# Altium PCB high-spped-thermocouple-logger-2ch_panel.PcbDoc (part 2 of 2)
Units mm, origin at the board's own origin, x right, y up, seen from the top; angles counter-clockwise.
Board outline 100 x 200 mm, 4 copper layers (Top Layer, GND Layer, VCC Layer, Bottom Layer), stack 1.55 mm thick; 2 components, 0 nets, 0 pads, 0 vias.
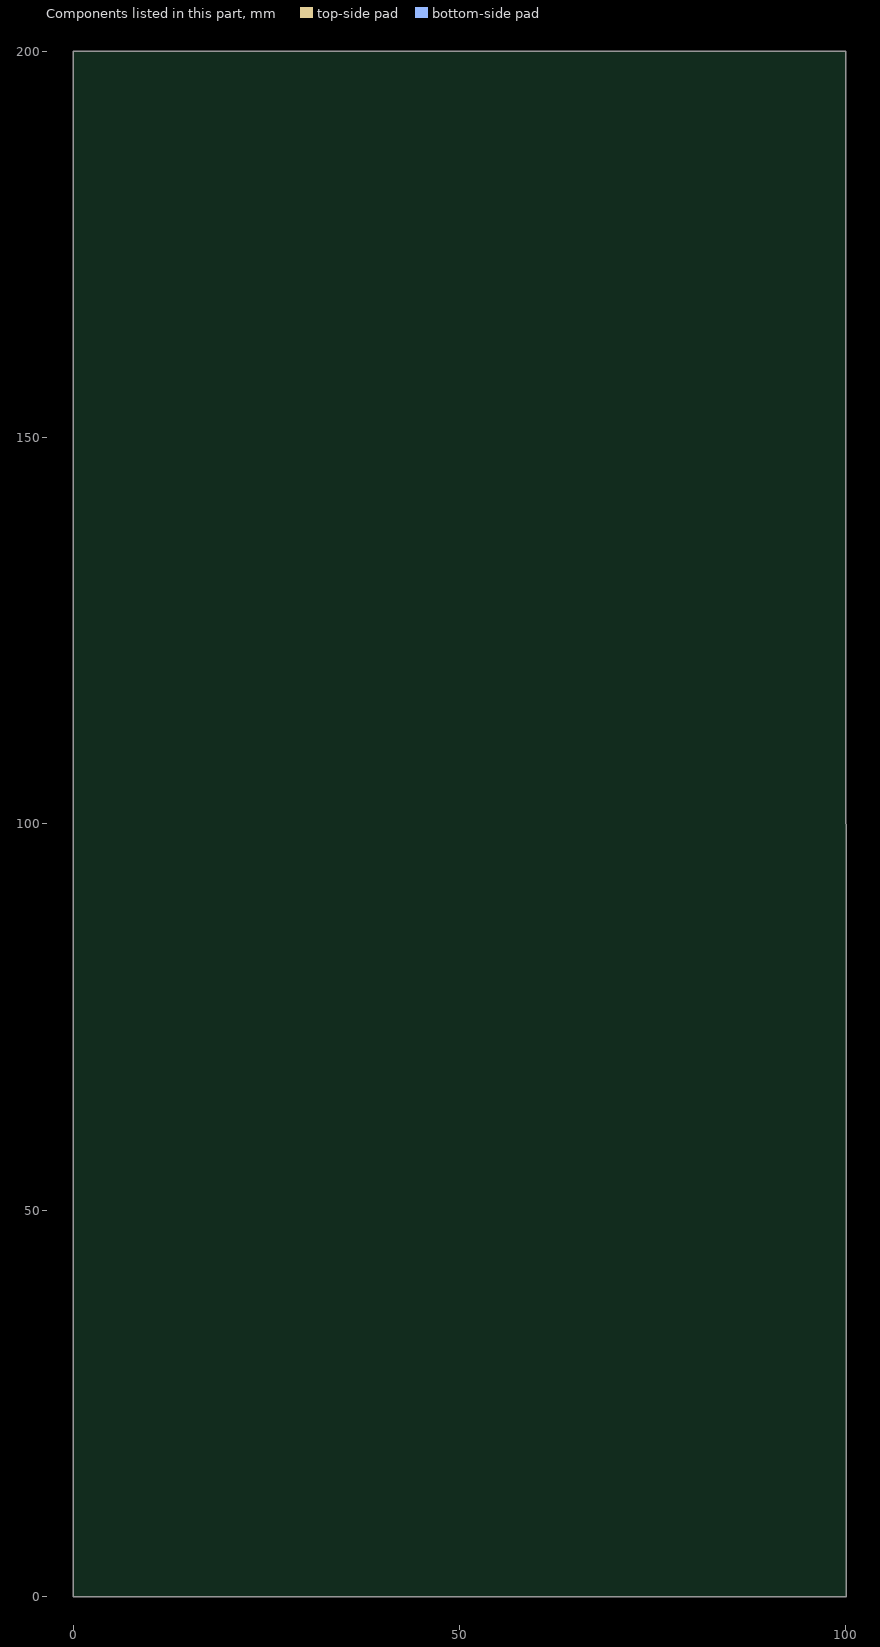
[diagram p4: the components of this part, seen from the top]

## Silkscreen, mask and mechanical layers (free items; w line width, h text height) (continued)
Mfg Info:
  drawing of 168 lines, arcs and shapes, not listed
  text "Layer" at -47.882,-53.168 h1.52
  text "Name" at -37.47,-53.168 h1.52
  text "Material" at -8.014,-53.168 h1.52
  text "Thickness" at 13.824,-53.168 h1.52
  text "Constant" at 30.329,-53.168 h1.52
  text "P" at 89.221,-54.207 h3.32
  text "A" at 90.741,-54.207 h3.32
  text "N" at 92.45,-54.207 h3.32
  text "E" at 94.349,-54.207 h3.32
  text "L" at 95.679,-54.207 h3.32
  text "T" at 97.388,-54.207 h3.32
  text "H" at 98.717,-54.207 h3.32
  text "I" at 100.427,-54.207 h3.32
  text "C" at 101.186,-54.207 h3.32
  text "K" at 102.706,-54.207 h3.32
  text "N" at 104.225,-54.207 h3.32
  text "E" at 106.124,-54.207 h3.32
  text "S" at 107.454,-54.207 h3.32
  text "S" at 108.783,-54.207 h3.32
  text "A" at 133.557,-54.207 h3.32
  text "P" at 135.266,-54.207 h3.32
  text "P" at 136.786,-54.207 h3.32
  text "R" at 138.305,-54.207 h3.32
  text "O" at 139.824,-54.207 h3.32
  text "X" at 141.724,-54.207 h3.32
  text "I" at 143.243,-54.207 h3.32
  text "M" at 144.003,-54.207 h3.32
  text "A" at 146.282,-54.207 h3.32
  text "T" at 147.991,-54.207 h3.32
  text "E" at 149.32,-54.207 h3.32
  text "Top Silkscreen" at -37.47,-56.216 h1.52
  text "Top Solder Mask" at -37.47,-59.264 h1.52
  text "Solder Resist" at -8.014,-59.264 h1.52
  text "0.005mm" at 13.824,-59.264 h1.52
  text "3.5" at 30.329,-59.264 h1.52
  text "C" at 89.221,-59.525 h3.32
  text "O" at 90.741,-59.525 h3.32
  text "P" at 92.64,-59.525 h3.32
  text "P" at 94.159,-59.525 h3.32
  text "E" at 95.679,-59.525 h3.32
  text "R" at 97.008,-59.525 h3.32
  text "T" at 99.097,-59.525 h3.32
  text "H" at 100.427,-59.525 h3.32
  text "I" at 102.136,-59.525 h3.32
  text "C" at 102.896,-59.525 h3.32
  text "K" at 104.415,-59.525 h3.32
  text "N" at 105.934,-59.525 h3.32
  text "E" at 107.834,-59.525 h3.32
  text "S" at 109.163,-59.525 h3.32
  text "S" at 110.492,-59.525 h3.32
  text "F" at 133.557,-59.525 h3.32
  text "I" at 134.887,-59.525 h3.32
  text "N" at 135.646,-59.525 h3.32
  text "A" at 137.545,-59.525 h3.32
  text "L" at 139.255,-59.525 h3.32
  text "(" at 140.964,-59.525 h3.32
  text "A" at 141.914,-59.525 h3.32
  text "F" at 143.623,-59.525 h3.32
  text "T" at 144.952,-59.525 h3.32
  text "E" at 146.282,-59.525 h3.32
  text "R" at 147.611,-59.525 h3.32
  text "P" at 149.7,-59.525 h3.32
  text "L" at 151.22,-59.525 h3.32
  text "A" at 152.359,-59.525 h3.32
  text "T" at 154.068,-59.525 h3.32
  text "I" at 155.398,-59.525 h3.32
  text "N" at 156.157,-59.525 h3.32
  text "G" at 158.057,-59.525 h3.32
  text ")" at 159.766,-59.525 h3.32
  text "1" at -47.882,-62.312 h1.52
  text "Top Layer" at -37.47,-62.312 h1.52
  text "0.035mm" at 13.824,-62.312 h1.52
  text "I" at 89.221,-64.843 h3.32
  text "N" at 89.981,-64.843 h3.32
  text "S" at 91.88,-64.843 h3.32
  text "U" at 93.21,-64.843 h3.32
  text "L" at 94.919,-64.843 h3.32
  text "A" at 96.059,-64.843 h3.32
  text "T" at 97.768,-64.843 h3.32
  text "I" at 99.097,-64.843 h3.32
  text "O" at 99.857,-64.843 h3.32
  text "N" at 101.756,-64.843 h3.32
  text "M" at 104.225,-64.843 h3.32
  text "A" at 106.504,-64.843 h3.32
  text "T" at 108.213,-64.843 h3.32
  text "E" at 109.543,-64.843 h3.32
  text "R" at 110.872,-64.843 h3.32
  text "I" at 112.392,-64.843 h3.32
  text "A" at 113.151,-64.843 h3.32
  text "L" at 114.861,-64.843 h3.32
  text "T" at 116.57,-64.843 h3.32
  text "H" at 117.899,-64.843 h3.32
  text "I" at 119.609,-64.843 h3.32
  text "C" at 120.368,-64.843 h3.32
  text "K" at 121.888,-64.843 h3.32
  text "N" at 123.407,-64.843 h3.32
  text "E" at 125.306,-64.843 h3.32
  text "S" at 126.636,-64.843 h3.32
  text "S" at 127.965,-64.843 h3.32
  text "R" at 133.557,-64.843 h3.32
  text "E" at 135.076,-64.843 h3.32
  text "C" at 136.406,-64.843 h3.32
  text "O" at 137.925,-64.843 h3.32
  text "M" at 139.824,-64.843 h3.32
  text "M" at 142.103,-64.843 h3.32
  text "E" at 144.382,-64.843 h3.32
  text "N" at 145.712,-64.843 h3.32
  text "D" at 147.611,-64.843 h3.32
  text "E" at 149.32,-64.843 h3.32
  text "D" at 150.65,-64.843 h3.32
  text "Dielectric 1" at -37.47,-65.36 h1.52
  text "FR-4" at -8.014,-65.36 h1.52
  text "0.350mm" at 13.824,-65.36 h1.52
  text "4.2" at 30.329,-65.36 h1.52
  text "2" at -47.882,-68.408 h1.52
  text "GND Layer" at -37.47,-68.408 h1.52
  text "0.035mm" at 13.824,-68.408 h1.52
  text "D" at 89.221,-70.161 h3.32
  text "I" at 90.931,-70.161 h3.32
  text "E" at 91.69,-70.161 h3.32
  text "L" at 93.02,-70.161 h3.32
  text "E" at 94.159,-70.161 h3.32
  text "C" at 95.489,-70.161 h3.32
  text "T" at 97.008,-70.161 h3.32
  text "R" at 98.338,-70.161 h3.32
  text "I" at 99.857,-70.161 h3.32
  text "C" at 100.617,-70.161 h3.32
  text "C" at 102.706,-70.161 h3.32
  text "O" at 104.225,-70.161 h3.32
  text "N" at 106.124,-70.161 h3.32
  text "S" at 108.023,-70.161 h3.32
  text "T" at 109.353,-70.161 h3.32
  text "A" at 110.682,-70.161 h3.32
  text "N" at 112.392,-70.161 h3.32
  text "T" at 114.291,-70.161 h3.32
  text "S" at 115.62,-70.161 h3.32
  text "A" at 133.557,-70.161 h3.32
  text "P" at 135.266,-70.161 h3.32
  text "P" at 136.786,-70.161 h3.32
  text "R" at 138.305,-70.161 h3.32
  text "O" at 139.824,-70.161 h3.32
  text "X" at 141.724,-70.161 h3.32
  text "I" at 143.243,-70.161 h3.32
  text "M" at 144.003,-70.161 h3.32
  text "A" at 146.282,-70.161 h3.32
  text "T" at 147.991,-70.161 h3.32
  text "E" at 149.32,-70.161 h3.32
  text "Dielectric 3" at -37.47,-71.456 h1.52
  text "FR-4" at -8.014,-71.456 h1.52
  text "0.710mm" at 13.824,-71.456 h1.52
  text "4.2" at 30.329,-71.456 h1.52
  text "3" at -47.882,-74.504 h1.52
  text "VCC Layer" at -37.47,-74.504 h1.52
  text "0.035mm" at 13.824,-74.504 h1.52
  text "M" at 89.221,-75.478 h3.32
  text "A" at 91.5,-75.478 h3.32
  text "T" at 93.21,-75.478 h3.32
  text "E" at 94.539,-75.478 h3.32
  text "R" at 95.869,-75.478 h3.32
  text "I" at 97.388,-75.478 h3.32
  text "A" at 98.148,-75.478 h3.32
  text "L" at 99.857,-75.478 h3.32
  text "S" at 100.996,-75.478 h3.32
  text "I" at 102.896,-75.478 h3.32
  text "N" at 103.655,-75.478 h3.32
  text "S" at 106.124,-75.478 h3.32
  text "T" at 107.454,-75.478 h3.32
  text "A" at 108.783,-75.478 h3.32
  text "C" at 110.492,-75.478 h3.32
  text "K" at 112.012,-75.478 h3.32
  text "U" at 113.531,-75.478 h3.32
  text "P" at 115.24,-75.478 h3.32
  text "T" at 117.329,-75.478 h3.32
  text "A" at 118.659,-75.478 h3.32
  text "B" at 120.368,-75.478 h3.32
  text "L" at 121.888,-75.478 h3.32
  text "E" at 123.027,-75.478 h3.32
  text "R" at 133.557,-75.478 h3.32
  text "E" at 135.076,-75.478 h3.32
  text "C" at 136.406,-75.478 h3.32
  text "O" at 137.925,-75.478 h3.32
  text "M" at 139.824,-75.478 h3.32
  text "M" at 142.103,-75.478 h3.32
  text "E" at 144.382,-75.478 h3.32
  text "N" at 145.712,-75.478 h3.32
  text "D" at 147.611,-75.478 h3.32
  text "E" at 149.32,-75.478 h3.32
  text "D" at 150.65,-75.478 h3.32
  text "Dielectric 2" at -37.47,-77.552 h1.52
  text "FR-4" at -8.014,-77.552 h1.52
  text "0.350mm" at 13.824,-77.552 h1.52
  text "4.2" at 30.329,-77.552 h1.52
  text "4" at -47.882,-80.6 h1.52
  text "Bottom Layer" at -37.47,-80.6 h1.52
  text "0.035mm" at 13.824,-80.6 h1.52
  text "U" at 89.221,-80.796 h3.32
  text "S" at 90.931,-80.796 h3.32
  text "E" at 92.26,-80.796 h3.32
  text "O" at 94.159,-80.796 h3.32
  text "N" at 96.059,-80.796 h3.32
  text "L" at 97.958,-80.796 h3.32
  text "Y" at 99.097,-80.796 h3.32
  text "U" at 100.996,-80.796 h3.32
  text "L" at 102.706,-80.796 h3.32
  text "9" at 103.845,-80.796 h3.32
  text "4" at 105.175,-80.796 h3.32
  text "V" at 107.074,-80.796 h3.32
  text "-" at 108.783,-80.796 h3.32
  text "0" at 109.733,-80.796 h3.32
  text "M" at 111.632,-80.796 h3.32
  text "A" at 113.911,-80.796 h3.32
  text "T" at 115.62,-80.796 h3.32
  text "E" at 116.95,-80.796 h3.32
  text "R" at 118.279,-80.796 h3.32
  text "I" at 119.798,-80.796 h3.32
  text "A" at 120.558,-80.796 h3.32
  text "L" at 122.267,-80.796 h3.32
  text "M" at 133.557,-80.796 h3.32
  text "A" at 135.836,-80.796 h3.32
  text "N" at 137.545,-80.796 h3.32
  text "D" at 139.445,-80.796 h3.32
  text "A" at 141.154,-80.796 h3.32
  text "T" at 142.863,-80.796 h3.32
  text "O" at 144.193,-80.796 h3.32
  text "R" at 146.092,-80.796 h3.32
  text "Y" at 147.611,-80.796 h3.32
  text "Bottom Solder Mask" at -37.47,-83.648 h1.52
  text "Solder Resist" at -8.014,-83.648 h1.52
  text "0.005mm" at 13.824,-83.648 h1.52
  text "3.5" at 30.329,-83.648 h1.52
  text "B" at 89.221,-86.114 h3.32
  text "O" at 90.741,-86.114 h3.32
  text "A" at 92.64,-86.114 h3.32
  text "R" at 94.349,-86.114 h3.32
  text "D" at 95.869,-86.114 h3.32
  text "F" at 98.148,-86.114 h3.32
  text "I" at 99.477,-86.114 h3.32
  text "N" at 100.237,-86.114 h3.32
  text "I" at 102.136,-86.114 h3.32
  text "S" at 102.896,-86.114 h3.32
  text "H" at 104.225,-86.114 h3.32
  text "E" at 133.557,-86.114 h3.32
  text "N" at 134.887,-86.114 h3.32
  text "I" at 136.786,-86.114 h3.32
  text "G" at 137.545,-86.114 h3.32
  text "(" at 139.824,-86.114 h3.32
  text "N" at 140.774,-86.114 h3.32
  text "I" at 142.673,-86.114 h3.32
  text "T" at 144.003,-86.114 h3.32
  text "H" at 145.332,-86.114 h3.32
  text "I" at 147.041,-86.114 h3.32
  text "C" at 147.801,-86.114 h3.32
  text "K" at 149.32,-86.114 h3.32
  text "N" at 150.84,-86.114 h3.32
  text "E" at 152.739,-86.114 h3.32
  text "S" at 154.068,-86.114 h3.32
  text "S" at 155.398,-86.114 h3.32
  text "3" at 157.297,-86.114 h3.32
  text "-" at 158.626,-86.114 h3.32
  text "6" at 159.576,-86.114 h3.32
  text "U" at 161.475,-86.114 h3.32
  text "M" at 163.184,-86.114 h3.32
  text "," at 165.464,-86.114 h3.32
  text "A" at 166.793,-86.114 h3.32
  text "U" at 168.502,-86.114 h3.32
  text "T" at 170.781,-86.114 h3.32
  text "H" at 172.111,-86.114 h3.32
  text "I" at 173.82,-86.114 h3.32
  text "C" at 174.58,-86.114 h3.32
  text "K" at 176.099,-86.114 h3.32
  text "N" at 177.618,-86.114 h3.32
  text "E" at 179.518,-86.114 h3.32
  text "S" at 180.847,-86.114 h3.32
  text "S" at 182.176,-86.114 h3.32
  text "≥" at 184.076,-86.114 h3.32
  text "0" at 185.975,-86.114 h3.32
  text "." at 187.304,-86.114 h3.32
  text "0" at 188.064,-86.114 h3.32
  text "5" at 189.393,-86.114 h3.32
  text "U" at 191.293,-86.114 h3.32
  text "M" at 193.002,-86.114 h3.32
  text ")" at 195.281,-86.114 h3.32
  text "Bottom Silkscreen" at -37.47,-86.696 h1.52
  text "Total board thickness:" at -47.882,-89.744 h1.52
  text "1.560mm" at 13.824,-89.744 h1.52
  text "S" at 89.221,-91.431 h3.32
  text "O" at 90.551,-91.431 h3.32
  text "L" at 92.45,-91.431 h3.32
  text "D" at 93.59,-91.431 h3.32
  text "E" at 95.299,-91.431 h3.32
  text "R" at 96.628,-91.431 h3.32
  text "M" at 98.148,-91.431 h3.32
  text "A" at 100.427,-91.431 h3.32
  text "S" at 102.136,-91.431 h3.32
  text "K" at 103.465,-91.431 h3.32
  text "G" at 133.557,-91.431 h3.32
  text "R" at 135.266,-91.431 h3.32
  text "E" at 136.786,-91.431 h3.32
  text "E" at 138.115,-91.431 h3.32
  text "N" at 139.445,-91.431 h3.32
  text "," at 141.344,-91.431 h3.32
  text "B" at 142.673,-91.431 h3.32
  text "O" at 144.193,-91.431 h3.32
  text "T" at 146.092,-91.431 h3.32
  text "H" at 147.421,-91.431 h3.32
  text "S" at 149.7,-91.431 h3.32
  text "I" at 151.03,-91.431 h3.32
  text "D" at 151.789,-91.431 h3.32
  text "E" at 153.499,-91.431 h3.32
  text "S" at 154.828,-91.431 h3.32
  text "S" at 89.221,-96.749 h3.32
  text "O" at 90.551,-96.749 h3.32
  text "L" at 92.45,-96.749 h3.32
  text "D" at 93.59,-96.749 h3.32
  text "E" at 95.299,-96.749 h3.32
  text "R" at 96.628,-96.749 h3.32
  text "M" at 98.717,-96.749 h3.32
  text "A" at 100.996,-96.749 h3.32
  text "S" at 102.706,-96.749 h3.32
  text "K" at 104.035,-96.749 h3.32
  text "C" at 106.124,-96.749 h3.32
  text "L" at 107.644,-96.749 h3.32
  text "E" at 108.783,-96.749 h3.32
  text "A" at 110.113,-96.749 h3.32
  text "R" at 111.822,-96.749 h3.32
  text "A" at 113.341,-96.749 h3.32
  text "N" at 115.05,-96.749 h3.32
  text "C" at 116.95,-96.749 h3.32
  text "E" at 118.469,-96.749 h3.32
  text "S" at 119.798,-96.749 h3.32
  text "F" at 121.698,-96.749 h3.32
  text "O" at 123.027,-96.749 h3.32
  text "R" at 124.926,-96.749 h3.32
  text "V" at 127.015,-96.749 h3.32
  text "I" at 128.725,-96.749 h3.32
  text "A" at 129.484,-96.749 h3.32
  text "S" at 131.194,-96.749 h3.32
  text "R" at 133.557,-96.749 h3.32
  text "E" at 135.076,-96.749 h3.32
  text "C" at 136.406,-96.749 h3.32
  text "O" at 137.925,-96.749 h3.32
  text "M" at 139.824,-96.749 h3.32
  text "M" at 142.103,-96.749 h3.32
  text "E" at 144.382,-96.749 h3.32
  text "N" at 145.712,-96.749 h3.32
  text "D" at 147.611,-96.749 h3.32
  text "E" at 149.32,-96.749 h3.32
  text "D" at 150.65,-96.749 h3.32
  text "M" at 89.221,-102.067 h3.32
  text "A" at 91.5,-102.067 h3.32
  text "X" at 93.21,-102.067 h3.32
  text "I" at 94.729,-102.067 h3.32
  text "M" at 95.489,-102.067 h3.32
  text "U" at 97.768,-102.067 h3.32
  text "M" at 99.477,-102.067 h3.32
  text "C" at 102.326,-102.067 h3.32
  text "L" at 103.845,-102.067 h3.32
  text "E" at 104.985,-102.067 h3.32
  text "A" at 106.314,-102.067 h3.32
  text "R" at 108.023,-102.067 h3.32
  text "A" at 109.543,-102.067 h3.32
  text "N" at 111.252,-102.067 h3.32
  text "C" at 113.151,-102.067 h3.32
  text "E" at 114.671,-102.067 h3.32
  text "O" at 116.57,-102.067 h3.32
  text "F" at 118.469,-102.067 h3.32
  text "S" at 120.368,-102.067 h3.32
  text "O" at 121.698,-102.067 h3.32
  text "L" at 123.597,-102.067 h3.32
  text "D" at 124.736,-102.067 h3.32
  text "E" at 126.446,-102.067 h3.32
  text "R" at 127.775,-102.067 h3.32
  text "1" at 133.557,-103.966 h3.32
  text "5" at 134.887,-103.966 h3.32
  text "0" at 136.216,-103.966 h3.32
  text "U" at 138.115,-103.966 h3.32
  text "M" at 139.824,-103.966 h3.32
  text "I" at 142.673,-103.966 h3.32
  text "F" at 143.433,-103.966 h3.32
  text "N" at 145.332,-103.966 h3.32
  text "O" at 147.231,-103.966 h3.32
  text "T" at 149.13,-103.966 h3.32
  text "S" at 151.03,-103.966 h3.32
  text "P" at 152.359,-103.966 h3.32
  text "E" at 153.878,-103.966 h3.32
  text "C" at 155.208,-103.966 h3.32
  text "I" at 156.727,-103.966 h3.32
  text "F" at 157.487,-103.966 h3.32
  text "I" at 158.816,-103.966 h3.32
  text "E" at 159.576,-103.966 h3.32
  text "D" at 160.905,-103.966 h3.32
  text "O" at 163.184,-103.966 h3.32
  text "T" at 165.084,-103.966 h3.32
  text "H" at 166.413,-103.966 h3.32
  text "E" at 168.122,-103.966 h3.32
  text "R" at 169.452,-103.966 h3.32
  text "W" at 170.971,-103.966 h3.32
  text "I" at 173.44,-103.966 h3.32
  text "S" at 174.2,-103.966 h3.32
  text "E" at 175.529,-103.966 h3.32
  text "M" at 89.221,-105.865 h3.32
  text "A" at 91.5,-105.865 h3.32
  text "S" at 93.21,-105.865 h3.32
  text "K" at 94.539,-105.865 h3.32
  text "F" at 96.628,-105.865 h3.32
  text "R" at 97.958,-105.865 h3.32
  text "O" at 99.477,-105.865 h3.32
  text "M" at 101.376,-105.865 h3.32
  text "V" at 104.225,-105.865 h3.32
  text "I" at 105.934,-105.865 h3.32
  text "A" at 106.694,-105.865 h3.32
  text "F" at 108.973,-105.865 h3.32
  text "I" at 110.302,-105.865 h3.32
  text "N" at 111.062,-105.865 h3.32
  text "A" at 112.961,-105.865 h3.32
  text "L" at 114.671,-105.865 h3.32
  text "H" at 116.38,-105.865 h3.32
  text "O" at 118.089,-105.865 h3.32
  text "L" at 119.988,-105.865 h3.32
  text "E" at 121.128,-105.865 h3.32
  text "E" at 123.027,-105.865 h3.32
  text "D" at 124.356,-105.865 h3.32
  text "G" at 126.066,-105.865 h3.32
  text "E" at 127.775,-105.865 h3.32
  text "R" at 89.221,-111.183 h3.32
  text "E" at 90.741,-111.183 h3.32
  text "M" at 92.07,-111.183 h3.32
  text "O" at 94.349,-111.183 h3.32
  text "V" at 96.248,-111.183 h3.32
  text "I" at 97.958,-111.183 h3.32
  text "N" at 98.717,-111.183 h3.32
  text "G" at 100.617,-111.183 h3.32
  text "S" at 102.896,-111.183 h3.32
  text "O" at 104.225,-111.183 h3.32
  text "L" at 106.124,-111.183 h3.32
  text "D" at 107.264,-111.183 h3.32
  text "E" at 108.973,-111.183 h3.32
  text "R" at 110.302,-111.183 h3.32
  text "M" at 111.822,-111.183 h3.32
  text "A" at 114.101,-111.183 h3.32
  text "S" at 115.81,-111.183 h3.32
  text "K" at 117.14,-111.183 h3.32
  text "B" at 119.229,-111.183 h3.32
  text "E" at 120.748,-111.183 h3.32
  text "T" at 122.077,-111.183 h3.32
  text "W" at 123.407,-111.183 h3.32
  text "E" at 125.876,-111.183 h3.32
  text "E" at 127.205,-111.183 h3.32
  text "N" at 128.535,-111.183 h3.32
  text "P" at 133.557,-113.082 h3.32
  text "O" at 135.076,-113.082 h3.32
  text "S" at 136.976,-113.082 h3.32
  text "S" at 138.305,-113.082 h3.32
  text "I" at 139.635,-113.082 h3.32
  text "B" at 140.394,-113.082 h3.32
  text "L" at 141.914,-113.082 h3.32
  text "E" at 143.053,-113.082 h3.32
  text "I" at 144.952,-113.082 h3.32
  text "F" at 145.712,-113.082 h3.32
  text "T" at 147.611,-113.082 h3.32
  text "H" at 148.941,-113.082 h3.32
  text "E" at 150.65,-113.082 h3.32
  text "P" at 152.549,-113.082 h3.32
  text "A" at 154.068,-113.082 h3.32
  text "D" at 155.778,-113.082 h3.32
  text "S" at 158.057,-113.082 h3.32
  text "P" at 159.386,-113.082 h3.32
  text "A" at 160.905,-113.082 h3.32
  text "C" at 162.615,-113.082 h3.32
  text "I" at 164.134,-113.082 h3.32
  text "N" at 164.894,-113.082 h3.32
  text "G" at 166.793,-113.082 h3.32
  text "(" at 169.072,-113.082 h3.32
  text "C" at 170.022,-113.082 h3.32
  text "L" at 171.541,-113.082 h3.32
  text "E" at 172.68,-113.082 h3.32
  text "A" at 174.01,-113.082 h3.32
  text "R" at 175.719,-113.082 h3.32
  text "A" at 177.239,-113.082 h3.32
  text "N" at 178.948,-113.082 h3.32
  text "C" at 180.847,-113.082 h3.32
  text "E" at 182.366,-113.082 h3.32
  text ")" at 183.696,-113.082 h3.32
  text "I" at 185.215,-113.082 h3.32
  text "S" at 185.975,-113.082 h3.32
  text "L" at 187.874,-113.082 h3.32
  text "E" at 189.013,-113.082 h3.32
  text "S" at 190.343,-113.082 h3.32
  text "S" at 191.672,-113.082 h3.32
  text "T" at 193.572,-113.082 h3.32
  text "H" at 194.901,-113.082 h3.32
  text "A" at 196.61,-113.082 h3.32
  text "N" at 198.32,-113.082 h3.32
  text "0" at 200.788,-113.082 h3.32
  text "." at 202.118,-113.082 h3.32
  text "2" at 202.878,-113.082 h3.32
  text "9" at 204.207,-113.082 h3.32
  text "M" at 206.106,-113.082 h3.32
  text "M" at 208.385,-113.082 h3.32
  text "T" at 89.221,-114.981 h3.32
  text "H" at 90.551,-114.981 h3.32
  text "E" at 92.26,-114.981 h3.32
  text "C" at 94.159,-114.981 h3.32
  text "O" at 95.679,-114.981 h3.32
  text "M" at 97.578,-114.981 h3.32
  text "P" at 99.857,-114.981 h3.32
  text "O" at 101.376,-114.981 h3.32
  text "N" at 103.275,-114.981 h3.32
  text "E" at 105.175,-114.981 h3.32
  text "N" at 106.504,-114.981 h3.32
  text "T" at 108.403,-114.981 h3.32
  text "P" at 110.302,-114.981 h3.32
  text "A" at 111.822,-114.981 h3.32
  text "D" at 113.531,-114.981 h3.32
  text "S" at 115.24,-114.981 h3.32
  text "S" at 89.221,-120.299 h3.32
  text "O" at 90.551,-120.299 h3.32
  text "L" at 92.45,-120.299 h3.32
  text "D" at 93.59,-120.299 h3.32
  text "E" at 95.299,-120.299 h3.32
  text "R" at 96.628,-120.299 h3.32
  text "M" at 98.148,-120.299 h3.32
  text "A" at 100.427,-120.299 h3.32
  text "S" at 102.136,-120.299 h3.32
  text "K" at 103.465,-120.299 h3.32
  text "O" at 105.554,-120.299 h3.32
  text "P" at 107.454,-120.299 h3.32
  text "E" at 108.973,-120.299 h3.32
  text "N" at 110.302,-120.299 h3.32
  text "I" at 112.202,-120.299 h3.32
  text "N" at 112.961,-120.299 h3.32
  text "G" at 114.861,-120.299 h3.32
  text "R" at 117.14,-120.299 h3.32
  text "E" at 118.659,-120.299 h3.32
  text "D" at 119.988,-120.299 h3.32
  text "U" at 121.698,-120.299 h3.32
  text "C" at 123.407,-120.299 h3.32
  text "T" at 124.926,-120.299 h3.32
  text "I" at 126.256,-120.299 h3.32
  text "O" at 127.015,-120.299 h3.32
  text "N" at 128.915,-120.299 h3.32
  text "P" at 133.557,-122.198 h3.32
  text "O" at 135.076,-122.198 h3.32
  text "S" at 136.976,-122.198 h3.32
  text "S" at 138.305,-122.198 h3.32
  text "I" at 139.635,-122.198 h3.32
  text "B" at 140.394,-122.198 h3.32
  text "L" at 141.914,-122.198 h3.32
  text "E" at 143.053,-122.198 h3.32
  text "T" at 144.952,-122.198 h3.32
  text "O" at 146.282,-122.198 h3.32
  text "A" at 148.751,-122.198 h3.32
  text "V" at 150.46,-122.198 h3.32
  text "O" at 152.169,-122.198 h3.32
  text "I" at 154.068,-122.198 h3.32
  text "D" at 154.828,-122.198 h3.32
  text "E" at 157.107,-122.198 h3.32
  text "X" at 158.437,-122.198 h3.32
  text "P" at 159.956,-122.198 h3.32
  text "O" at 161.475,-122.198 h3.32
  text "S" at 163.374,-122.198 h3.32
  text "E" at 164.704,-122.198 h3.32
  text "D" at 166.033,-122.198 h3.32
  text "C" at 168.312,-122.198 h3.32
  text "O" at 169.832,-122.198 h3.32
  text "P" at 171.731,-122.198 h3.32
  text "P" at 173.25,-122.198 h3.32
  text "E" at 174.77,-122.198 h3.32
  text "R" at 176.099,-122.198 h3.32
  text "O" at 89.221,-124.098 h3.32
  text "N" at 91.121,-124.098 h3.32
  text "F" at 93.59,-124.098 h3.32
  text "I" at 94.919,-124.098 h3.32
  text "D" at 95.679,-124.098 h3.32
  text "U" at 97.388,-124.098 h3.32
  text "C" at 99.097,-124.098 h3.32
  text "I" at 100.617,-124.098 h3.32
  text "A" at 101.376,-124.098 h3.32
  text "L" at 103.086,-124.098 h3.32
  text "M" at 104.795,-124.098 h3.32
  text "A" at 107.074,-124.098 h3.32
  text "R" at 108.783,-124.098 h3.32
  text "K" at 110.302,-124.098 h3.32
  text "S" at 111.822,-124.098 h3.32
  text "S" at 89.221,-129.415 h3.32
  text "I" at 90.551,-129.415 h3.32
  text "L" at 91.311,-129.415 h3.32
  text "K" at 92.45,-129.415 h3.32
  text "S" at 93.969,-129.415 h3.32
  text "C" at 95.299,-129.415 h3.32
  text "R" at 96.818,-129.415 h3.32
  text "E" at 98.338,-129.415 h3.32
  text "E" at 99.667,-129.415 h3.32
  text "N" at 100.996,-129.415 h3.32
  text "W" at 133.557,-129.415 h3.32
  text "H" at 136.026,-129.415 h3.32
  text "I" at 137.735,-129.415 h3.32
  text "T" at 138.495,-129.415 h3.32
  text "E" at 139.824,-129.415 h3.32
  text "," at 141.154,-129.415 h3.32
  text "T" at 142.483,-129.415 h3.32
  text "O" at 143.813,-129.415 h3.32
  text "P" at 145.712,-129.415 h3.32
  text "O" at 147.801,-129.415 h3.32
  text "N" at 149.7,-129.415 h3.32
  text "L" at 151.599,-129.415 h3.32
  text "Y" at 152.739,-129.415 h3.32
  text "S" at 89.221,-134.733 h3.32
  text "I" at 90.551,-134.733 h3.32
  text "L" at 91.311,-134.733 h3.32
  text "K" at 92.45,-134.733 h3.32
  text "S" at 93.969,-134.733 h3.32
  text "C" at 95.299,-134.733 h3.32
  text "R" at 96.818,-134.733 h3.32
  text "E" at 98.338,-134.733 h3.32
  text "E" at 99.667,-134.733 h3.32
  text "N" at 100.996,-134.733 h3.32
  text "O" at 103.465,-134.733 h3.32
  text "V" at 105.365,-134.733 h3.32
  text "E" at 107.074,-134.733 h3.32
  text "R" at 108.403,-134.733 h3.32
  text "L" at 109.923,-134.733 h3.32
  text "A" at 111.062,-134.733 h3.32
  text "P" at 112.771,-134.733 h3.32
  text "P" at 114.291,-134.733 h3.32
  text "I" at 115.81,-134.733 h3.32
  text "N" at 116.57,-134.733 h3.32
  text "G" at 118.469,-134.733 h3.32
  text "T" at 120.748,-134.733 h3.32
  text "H" at 122.077,-134.733 h3.32
  text "E" at 123.787,-134.733 h3.32
  text "B" at 125.686,-134.733 h3.32
  text "A" at 127.205,-134.733 h3.32
  text "S" at 128.915,-134.733 h3.32
  text "E" at 130.244,-134.733 h3.32
  text "Y" at 133.557,-136.632 h3.32
  text "O" at 134.887,-136.632 h3.32
  text "U" at 136.786,-136.632 h3.32
  text "C" at 139.065,-136.632 h3.32
  text "A" at 140.584,-136.632 h3.32
  text "N" at 142.293,-136.632 h3.32
  text "C" at 144.762,-136.632 h3.32
  text "U" at 146.282,-136.632 h3.32
  text "T" at 147.991,-136.632 h3.32
  text "T" at 149.89,-136.632 h3.32
  text "H" at 151.22,-136.632 h3.32
  text "E" at 152.929,-136.632 h3.32
  text "O" at 154.828,-136.632 h3.32
  text "V" at 156.727,-136.632 h3.32
  text "E" at 158.437,-136.632 h3.32
  text "R" at 159.766,-136.632 h3.32
  text "L" at 161.285,-136.632 h3.32
  text "A" at 162.425,-136.632 h3.32
  text "P" at 164.134,-136.632 h3.32
  text "P" at 165.653,-136.632 h3.32
  text "I" at 167.173,-136.632 h3.32
  text "N" at 167.932,-136.632 h3.32
  text "G" at 169.832,-136.632 h3.32
  text "S" at 172.111,-136.632 h3.32
  text "I" at 173.44,-136.632 h3.32
  text "L" at 174.2,-136.632 h3.32
  text "K" at 175.339,-136.632 h3.32
  text "S" at 176.859,-136.632 h3.32
  text "C" at 178.188,-136.632 h3.32
  text "R" at 179.707,-136.632 h3.32
  text "E" at 181.227,-136.632 h3.32
  text "E" at 182.556,-136.632 h3.32
  text "N" at 183.886,-136.632 h3.32
  text "C" at 89.221,-138.531 h3.32
  text "O" at 90.741,-138.531 h3.32
  text "P" at 92.64,-138.531 h3.32
  text "P" at 94.159,-138.531 h3.32
  text "E" at 95.679,-138.531 h3.32
  text "R" at 97.008,-138.531 h3.32
  text "O" at 99.097,-138.531 h3.32
  text "R" at 100.996,-138.531 h3.32
  text "T" at 103.086,-138.531 h3.32
  text "H" at 104.415,-138.531 h3.32
  text "E" at 106.124,-138.531 h3.32
  text "B" at 108.023,-138.531 h3.32
  text "O" at 109.543,-138.531 h3.32
  text "A" at 111.442,-138.531 h3.32
  text "R" at 113.151,-138.531 h3.32
  text "D" at 114.671,-138.531 h3.32
  text "O" at 116.95,-138.531 h3.32
  text "U" at 118.849,-138.531 h3.32
  text "T" at 120.558,-138.531 h3.32
  text "L" at 121.888,-138.531 h3.32
  text "I" at 123.027,-138.531 h3.32
  text "N" at 123.787,-138.531 h3.32
  text "E" at 125.686,-138.531 h3.32
  text "A" at 89.221,-143.849 h3.32
  text "D" at 90.931,-143.849 h3.32
  text "D" at 92.64,-143.849 h3.32
  text "I" at 94.349,-143.849 h3.32
  text "N" at 95.109,-143.849 h3.32
  text "G" at 97.008,-143.849 h3.32
  text "U" at 99.287,-143.849 h3.32
  text "L" at 100.996,-143.849 h3.32
  text "L" at 102.706,-143.849 h3.32
  text "O" at 103.845,-143.849 h3.32
  text "G" at 105.744,-143.849 h3.32
  text "O" at 107.454,-143.849 h3.32
  text "," at 109.353,-143.849 h3.32
  text "F" at 110.682,-143.849 h3.32
  text "I" at 112.012,-143.849 h3.32
  text "L" at 112.771,-143.849 h3.32
  text "E" at 113.911,-143.849 h3.32
  text "N" at 115.24,-143.849 h3.32
  text "U" at 117.14,-143.849 h3.32
  text "M" at 118.849,-143.849 h3.32
  text "B" at 121.128,-143.849 h3.32
  text "E" at 122.647,-143.849 h3.32
  text "R" at 123.977,-143.849 h3.32
  text "O" at 126.066,-143.849 h3.32
  text "R" at 127.965,-143.849 h3.32
  text "O" at 133.557,-145.748 h3.32
  text "K" at 135.456,-145.748 h3.32
  text "," at 136.976,-145.748 h3.32
  text "T" at 138.305,-145.748 h3.32
  text "O" at 139.635,-145.748 h3.32
  text "S" at 142.103,-145.748 h3.32
  text "I" at 143.433,-145.748 h3.32
  text "L" at 144.193,-145.748 h3.32
  text "K" at 145.332,-145.748 h3.32
  text "S" at 146.851,-145.748 h3.32
  text "C" at 148.181,-145.748 h3.32
  text "R" at 149.7,-145.748 h3.32
  text "E" at 151.22,-145.748 h3.32
  text "E" at 152.549,-145.748 h3.32
  text "N" at 153.878,-145.748 h3.32
  text "O" at 156.347,-145.748 h3.32
  text "R" at 158.247,-145.748 h3.32
  text "S" at 160.336,-145.748 h3.32
  text "O" at 161.665,-145.748 h3.32
  text "L" at 163.564,-145.748 h3.32
  text "D" at 164.704,-145.748 h3.32
  text "E" at 166.413,-145.748 h3.32
  text "R" at 167.743,-145.748 h3.32
  text "M" at 169.262,-145.748 h3.32
  text "A" at 171.541,-145.748 h3.32
  text "S" at 173.25,-145.748 h3.32
  text "K" at 174.58,-145.748 h3.32
  text "M" at 89.221,-147.648 h3.32
  text "A" at 91.5,-147.648 h3.32
  text "T" at 93.21,-147.648 h3.32
  text "E" at 94.539,-147.648 h3.32
  text "R" at 95.869,-147.648 h3.32
  text "I" at 97.388,-147.648 h3.32
  text "A" at 98.148,-147.648 h3.32
  text "L" at 99.857,-147.648 h3.32
  text "Y" at 89.221,-152.965 h3.32
  text "O" at 90.551,-152.965 h3.32
  text "U" at 92.45,-152.965 h3.32
  text "R" at 94.159,-152.965 h3.32
  text "L" at 96.248,-152.965 h3.32
  text "O" at 97.388,-152.965 h3.32
  text "G" at 99.287,-152.965 h3.32
  text "O" at 100.996,-152.965 h3.32
  text "I" at 103.465,-152.965 h3.32
  text "N" at 104.225,-152.965 h3.32
  text "T" at 106.694,-152.965 h3.32
  text "H" at 108.023,-152.965 h3.32
  text "E" at 109.733,-152.965 h3.32
  text "S" at 111.632,-152.965 h3.32
  text "I" at 112.961,-152.965 h3.32
  text "L" at 113.721,-152.965 h3.32
  text "K" at 114.861,-152.965 h3.32
  text "S" at 116.38,-152.965 h3.32
  text "C" at 117.709,-152.965 h3.32
  text "R" at 119.229,-152.965 h3.32
  text "E" at 120.748,-152.965 h3.32
  text "E" at 122.077,-152.965 h3.32
  text "N" at 123.407,-152.965 h3.32
  text "L" at 125.876,-152.965 h3.32
  text "A" at 127.015,-152.965 h3.32
  text "Y" at 128.725,-152.965 h3.32
  text "E" at 130.054,-152.965 h3.32
  text "R" at 131.383,-152.965 h3.32
  text "O" at 133.557,-152.965 h3.32
  text "K" at 135.456,-152.965 h3.32
  text "," at 136.976,-152.965 h3.32
  text "I" at 138.305,-152.965 h3.32
  text "F" at 139.065,-152.965 h3.32
  text "T" at 140.964,-152.965 h3.32
  text "H" at 142.293,-152.965 h3.32
  text "E" at 144.003,-152.965 h3.32
  text "R" at 145.332,-152.965 h3.32
  text "E" at 146.851,-152.965 h3.32
  text "I" at 148.751,-152.965 h3.32
  text "S" at 149.51,-152.965 h3.32
  text "E" at 151.41,-152.965 h3.32
  text "N" at 152.739,-152.965 h3.32
  text "O" at 154.638,-152.965 h3.32
  text "U" at 156.537,-152.965 h3.32
  text "G" at 158.247,-152.965 h3.32
  text "H" at 159.956,-152.965 h3.32
  text "S" at 162.235,-152.965 h3.32
  text "P" at 163.564,-152.965 h3.32
  text "A" at 165.084,-152.965 h3.32
  text "C" at 166.793,-152.965 h3.32
  text "E" at 168.312,-152.965 h3.32
  text "D" at 89.221,-158.283 h3.32
  text "R" at 90.931,-158.283 h3.32
  text "I" at 92.45,-158.283 h3.32
  text "L" at 93.21,-158.283 h3.32
  text "L" at 94.349,-158.283 h3.32
  text "D" at 96.059,-158.283 h3.32
  text "I" at 97.768,-158.283 h3.32
  text "A" at 98.527,-158.283 h3.32
  text "M" at 100.237,-158.283 h3.32
  text "E" at 102.516,-158.283 h3.32
  text "T" at 103.845,-158.283 h3.32
  text "E" at 105.175,-158.283 h3.32
  text "R" at 106.504,-158.283 h3.32
  text "S" at 108.023,-158.283 h3.32
  text "O" at 109.923,-158.283 h3.32
  text "F" at 111.822,-158.283 h3.32
  text "P" at 113.721,-158.283 h3.32
  text "L" at 115.24,-158.283 h3.32
  text "A" at 116.38,-158.283 h3.32
  text "T" at 118.089,-158.283 h3.32
  text "E" at 119.419,-158.283 h3.32
  text "D" at 120.748,-158.283 h3.32
  text "H" at 123.027,-158.283 h3.32
  text "O" at 124.736,-158.283 h3.32
  text "L" at 126.636,-158.283 h3.32
  text "E" at 127.775,-158.283 h3.32
  text "S" at 129.104,-158.283 h3.32
  text "F" at 133.557,-158.283 h3.32
  text "I" at 134.887,-158.283 h3.32
  text "N" at 135.646,-158.283 h3.32
  text "A" at 137.545,-158.283 h3.32
  text "L" at 139.255,-158.283 h3.32
  text "U" at 89.221,-163.411 h3.32
  text "N" at 90.931,-163.411 h3.32
  text "S" at 92.83,-163.411 h3.32
  text "P" at 94.159,-163.411 h3.32
  text "E" at 95.679,-163.411 h3.32
  text "C" at 97.008,-163.411 h3.32
  text "I" at 98.527,-163.411 h3.32
  text "F" at 99.287,-163.411 h3.32
  text "I" at 100.617,-163.411 h3.32
  text "E" at 101.376,-163.411 h3.32
  text "D" at 102.706,-163.411 h3.32
  text "T" at 104.985,-163.411 h3.32
  text "O" at 106.314,-163.411 h3.32
  text "L" at 108.213,-163.411 h3.32
  text "E" at 109.353,-163.411 h3.32
  text "R" at 110.682,-163.411 h3.32
  text "A" at 112.202,-163.411 h3.32
  text "N" at 113.911,-163.411 h3.32
  text "C" at 115.81,-163.411 h3.32
  text "E" at 117.329,-163.411 h3.32
  text "S" at 118.659,-163.411 h3.32
  text "A" at 120.558,-163.411 h3.32
  text "R" at 122.267,-163.411 h3.32
  text "E" at 123.787,-163.411 h3.32
  text "A" at 125.686,-163.411 h3.32
  text "C" at 127.395,-163.411 h3.32
  text "C" at 128.915,-163.411 h3.32
  text "O" at 130.434,-163.411 h3.32
  text "R" at 132.333,-163.411 h3.32
  text "D" at 133.852,-163.411 h3.32
  text "I" at 135.562,-163.411 h3.32
  text "N" at 136.321,-163.411 h3.32
  text "G" at 138.221,-163.411 h3.32
  text "T" at 140.5,-163.411 h3.32
  text "O" at 141.829,-163.411 h3.32
  text "I" at 144.298,-163.411 h3.32
  text "P" at 145.058,-163.411 h3.32
  text "C" at 146.577,-163.411 h3.32
  text "-" at 148.096,-163.411 h3.32
  text "A" at 149.046,-163.411 h3.32
  text "-" at 150.755,-163.411 h3.32
  text "6" at 151.705,-163.411 h3.32
  text "0" at 153.034,-163.411 h3.32
  text "0" at 154.364,-163.411 h3.32
  text "C" at 156.263,-163.411 h3.32
  text "L" at 157.782,-163.411 h3.32
  text "A" at 158.922,-163.411 h3.32
  text "S" at 160.631,-163.411 h3.32
  text "S" at 161.96,-163.411 h3.32
  text "2" at 163.86,-163.411 h3.32
  text "(" at 165.759,-163.411 h3.32
  text "F" at 166.708,-163.411 h3.32
  text "O" at 168.038,-163.411 h3.32
  text "R" at 169.937,-163.411 h3.32
  text "R" at 172.026,-163.411 h3.32
  text "I" at 173.546,-163.411 h3.32
  text "G" at 174.305,-163.411 h3.32
  text "I" at 176.014,-163.411 h3.32
  text "D" at 176.774,-163.411 h3.32
  text "P" at 179.053,-163.411 h3.32
  text "C" at 180.573,-163.411 h3.32
  text "B" at 182.092,-163.411 h3.32
  text ")" at 183.611,-163.411 h3.32
  text "o" at 185.131,-163.411 h3.32
  text "r" at 186.65,-163.411 h3.32
  text "I" at 188.169,-163.411 h3.32
  text "P" at 188.929,-163.411 h3.32
  text "C" at 190.448,-163.411 h3.32
  text "-" at 191.968,-163.411 h3.32
  text "6" at 192.917,-163.411 h3.32
  text "0" at 194.247,-163.411 h3.32
  text "1" at 195.576,-163.411 h3.32
  text "3" at 196.906,-163.411 h3.32
  text "A" at 198.235,-163.411 h3.32
  text "(" at 200.514,-163.411 h3.32
  text "F" at 201.464,-163.411 h3.32
  text "O" at 202.793,-163.411 h3.32
  text "R" at 204.692,-163.411 h3.32
  text "F" at 206.781,-163.411 h3.32
  text "L" at 208.111,-163.411 h3.32
  text "E" at 209.25,-163.411 h3.32
  text "X" at 210.58,-163.411 h3.32
  text "A" at 212.669,-163.411 h3.32
  text "N" at 214.378,-163.411 h3.32
  text "D" at 216.277,-163.411 h3.32
  text "F" at 218.556,-163.411 h3.32
  text "L" at 219.886,-163.411 h3.32
  text "E" at 221.025,-163.411 h3.32
  text "X" at 222.355,-163.411 h3.32
  text "-" at 223.874,-163.411 h3.32
  text "R" at 89.221,-167.209 h3.32
  text "I" at 90.741,-167.209 h3.32
  text "G" at 91.5,-167.209 h3.32
  text "I" at 93.21,-167.209 h3.32
  text "D" at 93.969,-167.209 h3.32
  text "P" at 96.248,-167.209 h3.32
  text "C" at 97.768,-167.209 h3.32
  text "B" at 99.287,-167.209 h3.32
  text ")" at 100.807,-167.209 h3.32
  text "I" at 89.221,-172.527 h3.32
  text "F" at 89.981,-172.527 h3.32
  text "A" at 91.88,-172.527 h3.32
  text "N" at 93.59,-172.527 h3.32
  text "Y" at 95.489,-172.527 h3.32
  text "O" at 97.388,-172.527 h3.32
  text "F" at 99.287,-172.527 h3.32
  text "T" at 101.186,-172.527 h3.32
  text "H" at 102.516,-172.527 h3.32
  text "E" at 104.225,-172.527 h3.32
  text "C" at 106.124,-172.527 h3.32
  text "O" at 107.644,-172.527 h3.32
  text "P" at 109.543,-172.527 h3.32
  text "P" at 111.062,-172.527 h3.32
  text "E" at 112.582,-172.527 h3.32
  text "R" at 113.911,-172.527 h3.32
  text "E" at 116,-172.527 h3.32
  text "L" at 117.329,-172.527 h3.32
  text "E" at 118.469,-172.527 h3.32
  text "M" at 119.798,-172.527 h3.32
  text "E" at 122.077,-172.527 h3.32
  text "N" at 123.407,-172.527 h3.32
  text "T" at 125.306,-172.527 h3.32
  text "S" at 126.636,-172.527 h3.32
  text "I" at 128.535,-172.527 h3.32
  text "N" at 129.294,-172.527 h3.32
  text "T" at 131.194,-172.527 h3.32
  text "E" at 132.523,-172.527 h3.32
  text "R" at 133.852,-172.527 h3.32
  text "S" at 135.372,-172.527 h3.32
  text "E" at 136.701,-172.527 h3.32
  text "C" at 138.031,-172.527 h3.32
  text "T" at 139.55,-172.527 h3.32
  text "S" at 140.879,-172.527 h3.32
  text "W" at 142.779,-172.527 h3.32
  text "I" at 145.248,-172.527 h3.32
  text "T" at 146.007,-172.527 h3.32
  text "H" at 147.337,-172.527 h3.32
  text "T" at 149.616,-172.527 h3.32
  text "H" at 150.945,-172.527 h3.32
  text "E" at 152.654,-172.527 h3.32
  text "B" at 154.554,-172.527 h3.32
  text "O" at 156.073,-172.527 h3.32
  text "A" at 157.972,-172.527 h3.32
  text "R" at 159.681,-172.527 h3.32
  text "D" at 161.201,-172.527 h3.32
  text "O" at 163.48,-172.527 h3.32
  text "U" at 165.379,-172.527 h3.32
  text "T" at 167.088,-172.527 h3.32
  text "L" at 168.418,-172.527 h3.32
  text "I" at 169.557,-172.527 h3.32
  text "N" at 170.317,-172.527 h3.32
  text "E" at 172.216,-172.527 h3.32
  text "," at 173.546,-172.527 h3.32
  text "S" at 174.875,-172.527 h3.32
  text "H" at 176.204,-172.527 h3.32
  text "A" at 177.914,-172.527 h3.32
  text "V" at 179.623,-172.527 h3.32
  text "E" at 181.332,-172.527 h3.32
  text "I" at 183.231,-172.527 h3.32
  text "T" at 183.991,-172.527 h3.32
  text "A" at 185.89,-172.527 h3.32
  text "N" at 187.6,-172.527 h3.32
  text "D" at 189.499,-172.527 h3.32
  text "K" at 191.778,-172.527 h3.32
  text "E" at 193.297,-172.527 h3.32
  text "E" at 194.627,-172.527 h3.32
  text "P" at 195.956,-172.527 h3.32
  text "I" at 198.045,-172.527 h3.32
  text "T" at 198.805,-172.527 h3.32
  text "F" at 200.704,-172.527 h3.32
  text "R" at 202.033,-172.527 h3.32
  text "O" at 203.553,-172.527 h3.32
  text "M" at 205.452,-172.527 h3.32
  text "T" at 208.301,-172.527 h3.32
  text "H" at 209.63,-172.527 h3.32
  text "E" at 211.339,-172.527 h3.32
  text "O" at 213.239,-172.527 h3.32
  text "U" at 215.138,-172.527 h3.32
  text "T" at 216.847,-172.527 h3.32
  text "L" at 218.177,-172.527 h3.32
  text "I" at 219.316,-172.527 h3.32
  text "N" at 220.076,-172.527 h3.32
  text "E" at 221.975,-172.527 h3.32
  text "(" at 89.221,-176.325 h3.32
  text "M" at 90.171,-176.325 h3.32
  text "A" at 92.45,-176.325 h3.32
  text "X" at 94.159,-176.325 h3.32
  text "." at 95.679,-176.325 h3.32
  text "0" at 97.008,-176.325 h3.32
  text "." at 98.338,-176.325 h3.32
  text "3" at 99.097,-176.325 h3.32
  text "M" at 100.996,-176.325 h3.32
  text "M" at 103.275,-176.325 h3.32
  text "F" at 106.124,-176.325 h3.32
  text "O" at 107.454,-176.325 h3.32
  text "R" at 109.353,-176.325 h3.32
  text "R" at 111.442,-176.325 h3.32
  text "O" at 112.961,-176.325 h3.32
  text "U" at 114.861,-176.325 h3.32
  text "T" at 116.57,-176.325 h3.32
  text "I" at 117.899,-176.325 h3.32
  text "N" at 118.659,-176.325 h3.32
  text "G" at 120.558,-176.325 h3.32
  text "," at 122.267,-176.325 h3.32
  text "M" at 123.597,-176.325 h3.32
  text "A" at 125.876,-176.325 h3.32
  text "X" at 127.585,-176.325 h3.32
  text "." at 129.104,-176.325 h3.32
  text "0" at 130.434,-176.325 h3.32
  text "." at 131.763,-176.325 h3.32
  text "5" at 132.523,-176.325 h3.32
  text "M" at 134.422,-176.325 h3.32
  text "M" at 136.701,-176.325 h3.32
  text "F" at 139.55,-176.325 h3.32
  text "O" at 140.879,-176.325 h3.32
  text "R" at 142.779,-176.325 h3.32
  text "V" at 144.868,-176.325 h3.32
  text "-" at 146.577,-176.325 h3.32
  text "S" at 147.527,-176.325 h3.32
  text "C" at 148.856,-176.325 h3.32
  text "O" at 150.375,-176.325 h3.32
  text "R" at 152.275,-176.325 h3.32
  text "I" at 153.794,-176.325 h3.32
  text "N" at 154.554,-176.325 h3.32
  text "G" at 156.453,-176.325 h3.32
  text ")" at 158.162,-176.325 h3.32
  text "." at 159.112,-176.325 h3.32
  text "D" at 89.221,-181.643 h3.32
  text "O" at 90.931,-181.643 h3.32
  text "N" at 93.4,-181.643 h3.32
  text "O" at 95.299,-181.643 h3.32
  text "T" at 97.198,-181.643 h3.32
  text "P" at 99.097,-181.643 h3.32
  text "L" at 100.617,-181.643 h3.32
  text "A" at 101.756,-181.643 h3.32
  text "C" at 103.465,-181.643 h3.32
  text "E" at 104.985,-181.643 h3.32
  text "A" at 106.884,-181.643 h3.32
  text "N" at 108.593,-181.643 h3.32
  text "Y" at 110.492,-181.643 h3.32
  text "C" at 112.392,-181.643 h3.32
  text "O" at 113.911,-181.643 h3.32
  text "P" at 115.81,-181.643 h3.32
  text "P" at 117.329,-181.643 h3.32
  text "E" at 118.849,-181.643 h3.32
  text "R" at 120.178,-181.643 h3.32
  text "S" at 122.267,-181.643 h3.32
  text "H" at 123.597,-181.643 h3.32
  text "A" at 125.306,-181.643 h3.32
  text "P" at 127.015,-181.643 h3.32
  text "E" at 128.535,-181.643 h3.32
  text "S" at 129.864,-181.643 h3.32
  text "A" at 131.763,-181.643 h3.32
  text "R" at 133.473,-181.643 h3.32
  text "O" at 134.992,-181.643 h3.32
  text "U" at 136.891,-181.643 h3.32
  text "N" at 138.6,-181.643 h3.32
  text "D" at 140.5,-181.643 h3.32
  text "T" at 142.779,-181.643 h3.32
  text "H" at 144.108,-181.643 h3.32
  text "E" at 145.817,-181.643 h3.32
  text "F" at 147.717,-181.643 h3.32
  text "I" at 149.046,-181.643 h3.32
  text "D" at 149.806,-181.643 h3.32
  text "U" at 151.515,-181.643 h3.32
  text "C" at 153.224,-181.643 h3.32
  text "I" at 154.744,-181.643 h3.32
  text "A" at 155.503,-181.643 h3.32
  text "L" at 157.213,-181.643 h3.32
  text "M" at 158.922,-181.643 h3.32
  text "A" at 161.201,-181.643 h3.32
  text "R" at 162.91,-181.643 h3.32
  text "K" at 164.429,-181.643 h3.32
  text "S" at 165.949,-181.643 h3.32
  text "I" at 167.848,-181.643 h3.32
  text "N" at 168.608,-181.643 h3.32
  text "1" at 171.077,-181.643 h3.32
  text "0" at 172.406,-181.643 h3.32
  text "M" at 174.305,-181.643 h3.32
  text "M" at 176.584,-181.643 h3.32
  text "R" at 179.433,-181.643 h3.32
  text "A" at 180.952,-181.643 h3.32
  text "D" at 182.662,-181.643 h3.32
  text "I" at 184.371,-181.643 h3.32
  text "U" at 185.131,-181.643 h3.32
  text "S" at 186.84,-181.643 h3.32
  text "O" at 188.739,-181.643 h3.32
  text "N" at 190.638,-181.643 h3.32
  text "T" at 193.107,-181.643 h3.32
  text "H" at 194.437,-181.643 h3.32
  text "E" at 196.146,-181.643 h3.32
  text "B" at 198.045,-181.643 h3.32
  text "R" at 199.564,-181.643 h3.32
  text "E" at 201.084,-181.643 h3.32
  text "A" at 202.413,-181.643 h3.32
  text "K" at 204.123,-181.643 h3.32
  text "A" at 205.642,-181.643 h3.32
  text "W" at 207.351,-181.643 h3.32
  text "A" at 209.82,-181.643 h3.32
  text "Y" at 211.529,-181.643 h3.32
  text "A" at 213.429,-181.643 h3.32
  text "R" at 215.138,-181.643 h3.32
  text "E" at 216.657,-181.643 h3.32
  text "A" at 217.987,-181.643 h3.32
  text "S" at 219.696,-181.643 h3.32
  text "E" at 89.221,-186.961 h3.32
  text "L" at 90.551,-186.961 h3.32
  text "E" at 91.69,-186.961 h3.32
  text "C" at 93.02,-186.961 h3.32
  text "T" at 94.539,-186.961 h3.32
  text "R" at 95.869,-186.961 h3.32
  text "I" at 97.388,-186.961 h3.32
  text "C" at 98.148,-186.961 h3.32
  text "A" at 99.667,-186.961 h3.32
  text "L" at 101.376,-186.961 h3.32
  text "T" at 103.086,-186.961 h3.32
  text "E" at 104.415,-186.961 h3.32
  text "S" at 105.744,-186.961 h3.32
  text "T" at 107.074,-186.961 h3.32
  text "R" at 108.973,-186.961 h3.32
  text "E" at 110.492,-186.961 h3.32
  text "Q" at 111.822,-186.961 h3.32
  text "U" at 113.721,-186.961 h3.32
  text "I" at 115.43,-186.961 h3.32
  text "R" at 116.19,-186.961 h3.32
  text "E" at 117.709,-186.961 h3.32
  text "D" at 119.039,-186.961 h3.32
  text "P" at 89.221,-192.279 h3.32
  text "C" at 90.741,-192.279 h3.32
  text "B" at 92.26,-192.279 h3.32
  text "S" at 94.349,-192.279 h3.32
  text "H" at 95.679,-192.279 h3.32
  text "A" at 97.388,-192.279 h3.32
  text "L" at 99.097,-192.279 h3.32
  text "L" at 100.237,-192.279 h3.32
  text "M" at 101.946,-192.279 h3.32
  text "E" at 104.225,-192.279 h3.32
  text "E" at 105.554,-192.279 h3.32
  text "T" at 106.884,-192.279 h3.32
  text "T" at 108.783,-192.279 h3.32
  text "H" at 110.113,-192.279 h3.32
  text "E" at 111.822,-192.279 h3.32
  text "R" at 113.721,-192.279 h3.32
  text "O" at 115.24,-192.279 h3.32
  text "H" at 117.14,-192.279 h3.32
  text "S" at 118.849,-192.279 h3.32
  text "D" at 120.748,-192.279 h3.32
  text "I" at 122.457,-192.279 h3.32
  text "R" at 123.217,-192.279 h3.32
  text "E" at 124.736,-192.279 h3.32
  text "C" at 126.066,-192.279 h3.32
  text "T" at 127.585,-192.279 h3.32
  text "I" at 128.915,-192.279 h3.32
  text "V" at 129.674,-192.279 h3.32
  text "E" at 131.383,-192.279 h3.32

## Panel: embedded boards
"high-spped-thermocouple-logger-2ch.PcbDoc" at 100,0, 1 rows x 1 columns, spacing 63.5 x 38.1, rotation 90

## Text inside footprints (layer, text, board x,y; h text height)
Designator4: Bottom Silkscreen "*.GBO" at 58.747,-21.567 h3; PCB Info "*.GM2" at 58.75,-21.498 h3; Top Silkscreen "*.GTO" at 58.747,-21.567 h3; Comp Outl Top THT "*.GM9" at 58.747,-21.567 h3; Top Layer "*.GTL" at 58.747,-21.567 h3; Desg Top THT "*.GM11" at 58.747,-21.567 h3; Stencil Engrv Top "*.GM23" at 58.747,-21.567 h3; VCC Layer "*.G2" at 58.747,-21.567 h3; Stencil Engrv Bot "*.GM24" at 58.747,-21.567 h3; Mfg Info "*.GM28" at 58.747,-21.567 h3; Mfg Info "Pripona/Extension:" at 19.747,-21.067 h2; Mfg Info "Vrstva/Layer:" at -44.753,-21.067 h2; Mfg Info "Cislo DPS/PCB number:" at 14.747,-26.567 h2; Mfg Info "Kontroloval/Checked by:" at -10.753,-31.067 h1; Mfg Info "Datum/Date:" at -10.753,-37.567 h1; Mfg Info "Kreslil/Drawn by:" at -10.753,-25.067 h1; Bottom Layer "*.GBL" at 58.747,-21.567 h3; Top Solder Mask "*.GTS" at 58.747,-21.567 h3; Bottom Solder Mask "*.GBS" at 58.747,-21.567 h3; Panel Outline "*.GM1" at 58.747,-21.567 h3; Route Tool Path "*.GM25" at 58.747,-21.567 h3; Dimension Top "*.GM26" at 58.747,-21.567 h3; Top Paste "*.GTP" at 58.747,-21.567 h3; Comp Outl Top SMD "*.GM3" at 58.747,-21.567 h3; Comp Outl Bot SMD "*.GM4" at 58.747,-21.567 h3; Desg Top SMD "*.GM5" at 58.747,-21.567 h3; Desg Bot SMD "*.GM6" at 58.747,-21.567 h3; Value Top SMD "*.GM7" at 58.747,-21.567 h3; Value Bot SMD "*.GM8" at 58.747,-21.567 h3; Comp Out Bot THT "*.GM10" at 58.747,-21.567 h3; GND Layer "*.G1" at 58.747,-21.567 h3; Desg Bot THT "*.GM12" at 58.747,-21.567 h3; Value Top THT "*.GM13" at 58.747,-21.567 h3; Value Bot THT "*.GM14" at 58.747,-21.567 h3; Courtyard Top "*.GM15" at 58.747,-21.567 h3; Courtyard Bot "*.GM16" at 58.747,-21.567 h3; 3D Models Top "*.GM17" at 58.747,-21.567 h3; 3D Models Bot "*.GM18" at 58.747,-21.567 h3; Aux. Silk Top SMD "*.GM19" at 58.747,-21.567 h3; Aux. Silk Bot SMD "*.GM20" at 58.747,-21.567 h3; Peelbl Mask Top "*.GM21" at 58.747,-21.567 h3; Peelbl Mask Bot "*.GM22" at 58.747,-21.567 h3; Dimension Bot "*.GM27" at 58.747,-21.567 h3; Bottom Paste "*.GBP" at 58.747,-21.567 h3; Keep-Out Layer "*.GKO" at 58.747,-21.567 h3
Designator5: PCB Info "Board edge" at -240.05,1.302 h2; PCB Info "85" at -233.35,-42.998 h1.5 r90; PCB Info "Free space" at -230.35,-50.498 h2 r90; PCB Info "PLACE THIS POINT AT CENTER OF LOWER PCB EDGE" at 54.65,-5.498 h2